# Altium PCB Wristband-v3.PcbDoc (part 3 of 3)
Units mil, origin at the board's own origin, x right, y up, seen from the top; angles counter-clockwise.
Board outline 1990 x 930 mil, 2 copper layers (Top Layer, Bottom Layer); 20 components, 39 nets, 136 pads, 57 vias.
Unrouted connection lines stored in the file: 2.
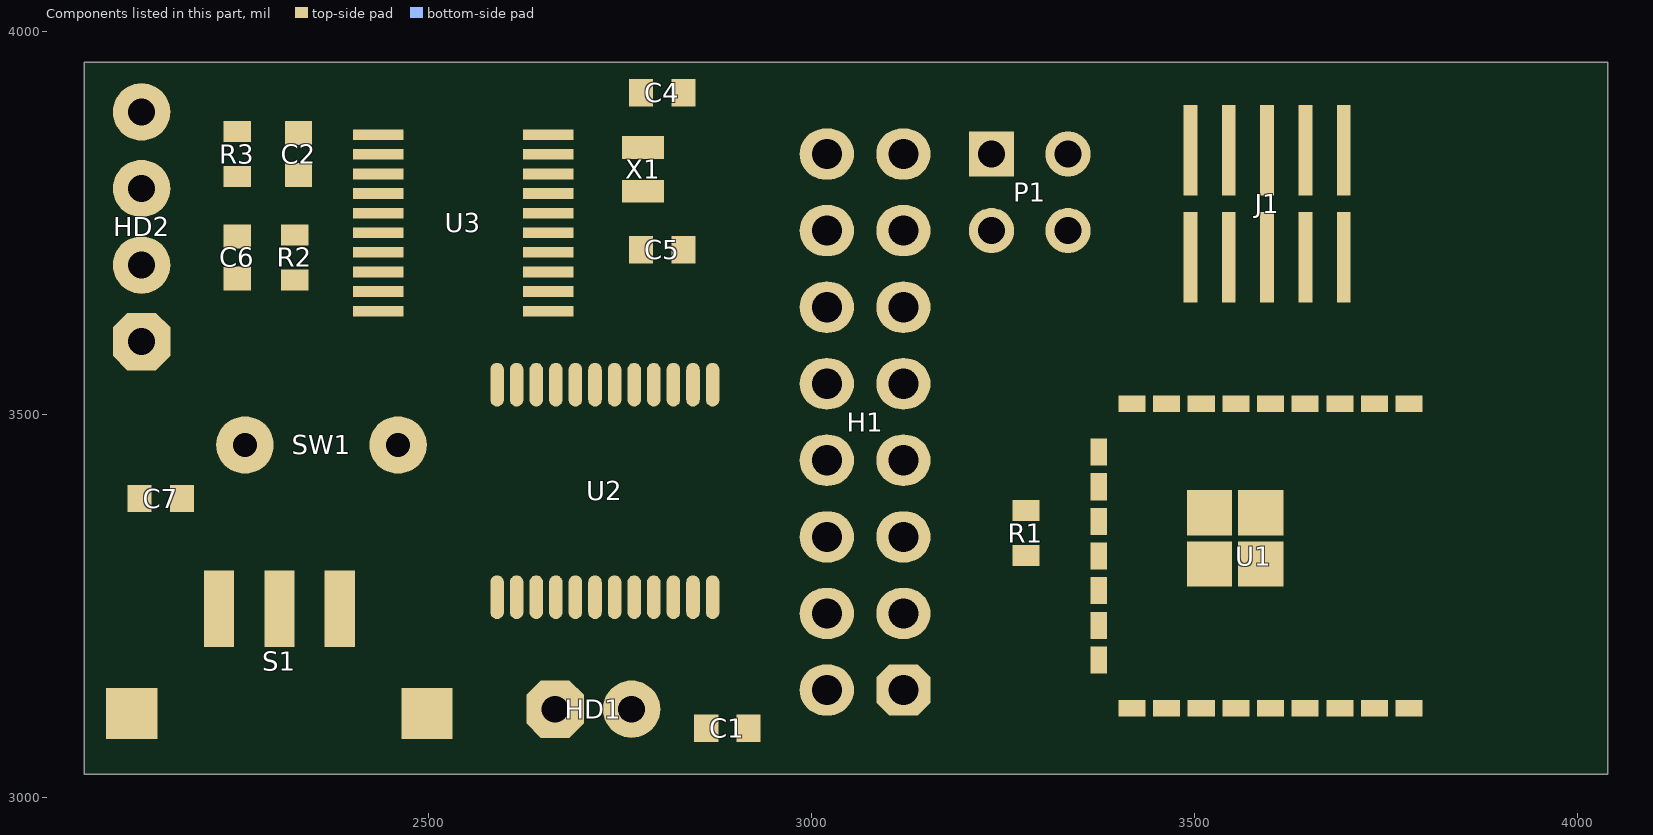
[diagram p3: the components of this part, seen from the top]

## Via types
v1: diameter 10, hole 8, Top Layer to Bottom Layer, 35 vias
v2: diameter 40, hole 25, Top Layer to Bottom Layer, 22 vias

## Nets (pads, with @x,y where several pads share a name; then routed paths per layer and width w, separated by ;. In a path a pad name is that pad's centre, name@x,y a point inside that pad or via, vN(x,y) a via of type N, cw(c..) or ccw(c..) an arc to the next point about the centre after c; other vN are vias at no path point) (continued)
copper on no net: (continued)
  Top Layer w0.5: 3899.25,3804.5 3903.75,3804.5 ; 3899.25,3805 3903.75,3805 ; 3899.25,3805.5 3903.75,3805.5 ; 3899.25,3806 3903.75,3806 ; 3899.25,3806.5 3903.75,3806.5 ; 3899.25,3807 3903.75,3807 ; 3899.25,3807.5 3903.75,3807.5 ; 3899.25,3808 3903.75,3808 ; 3899.25,3808.5 3903.75,3808.5 ; 3899.25,3809 3903.75,3809 ; 3899.25,3809.5 3903.75,3809.5 ; 3899.25,3810 3903.75,3810 ; 3899.25,3810.5 3903.75,3810.5 ; 3899.25,3811 3903.75,3811 ; 3899.25,3839 3969.75,3839 ; 3899.25,3879.5 3924.75,3879.5 ; 3899.75,3704.5 3905.25,3704.5 ; 3899.75,3752 3966.25,3752 ; 3899.75,3839.5 3969.25,3839.5 ; 3900.25,3713.5 3923.25,3713.5 ; 3900.25,3752.5 3966.75,3752.5 ; 3900.25,3840 3968.75,3840 ; 3900.25,3869 3921.25,3869 ; 3900.25,3889 3905.75,3889 ; 3900.75,3705 3904.75,3705 ; 3900.75,3726.5 3920.25,3726.5 ; 3900.75,3753 3966.75,3753 ; 3900.75,3840.5 3968.25,3840.5 ; 3900.75,3880 3921.25,3880 ; 3901.25,3705.5 3904.25,3705.5 ; 3901.25,3706 3904.25,3706 ; 3901.25,3706.5 3903.75,3706.5 ; 3901.25,3712.5 3905.75,3712.5 ; 3901.25,3713 3906.75,3713 ; 3901.25,3753.5 3967.25,3753.5 ; 3901.25,3841 3968.25,3841 ; 3901.25,3888.5 3905.75,3888.5 ; 3901.75,3712 3905.25,3712 ; 3901.75,3880.5 3905.75,3880.5 ; 3901.75,3888 3905.75,3888 ; 3902.25,3711 3904.75,3711 ; 3902.25,3711.5 3904.75,3711.5 ; 3902.25,3754 3967.75,3754 ; 3902.25,3841.5 3967.75,3841.5 ; 3902.25,3842 3967.25,3842 ; 3902.25,3881 3905.75,3881 ; 3902.25,3887 3905.75,3887 ; 3902.25,3887.5 3905.75,3887.5 ; 3902.75,3754.5 3968.25,3754.5 ; 3902.75,3881.5 3905.75,3881.5 ; 3902.75,3882 3905.75,3882 ; 3902.75,3886 3905.75,3886 ; 3902.75,3886.5 3905.75,3886.5 ; 3903.25,3842.5 3966.75,3842.5 ; 3903.25,3882.5 3905.75,3882.5 ; 3903.25,3883 3905.75,3883 ; 3903.25,3883.5 3905.75,3883.5 ; 3903.25,3884 3905.75,3884 ; 3903.25,3884.5 3905.75,3884.5 ; 3903.25,3885 3905.75,3885 ; 3903.25,3885.5 3905.75,3885.5 ; 3903.75,3755 3968.25,3755 ; 3903.75,3843 3966.75,3843 ; 3904.25,3755.5 3968.75,3755.5 ; 3904.25,3843.5 3966.25,3843.5 ; 3904.75,3696 3916.25,3696 ; 3904.75,3756 3969.25,3756 ; 3904.75,3844 3965.75,3844 ; 3904.75,3899.5 3916.75,3899.5 ; 3905.25,3756.5 3969.75,3756.5 ; 3905.75,3706.5 3910.25,3706.5 ; 3905.75,3707 3910.25,3707 ; 3905.75,3707.5 3910.25,3707.5 ; 3905.75,3708 3910.25,3708 ; 3905.75,3708.5 3910.25,3708.5 ; 3905.75,3709 3910.25,3709 ; 3905.75,3709.5 3910.25,3709.5 ; 3905.75,3844.5 3965.25,3844.5 ; 3906.25,3705.5 3909.75,3705.5 ; 3906.25,3706 3909.75,3706 ; 3906.25,3710 3910.25,3710 ; 3906.25,3710.5 3909.75,3710.5 ; 3906.25,3757 3969.75,3757 ; 3906.25,3784 3907.75,3784 ; 3906.25,3784.5 3907.75,3784.5 ; 3906.25,3785 3907.75,3785 ; 3906.25,3845 3964.75,3845 ; 3906.25,3869.5 3914.75,3869.5 ; 3906.75,3711 3909.75,3711 ; 3906.75,3726 3914.25,3726 ; 3906.75,3757.5 3970.25,3757.5 ; 3906.75,3785.5 3907.75,3785.5 ; 3906.75,3786 3907.75,3786 ; 3906.75,3786.5 3907.75,3786.5 ; 3906.75,3787 3907.75,3787 ; 3906.75,3787.5 3908.25,3787.5 ; 3906.75,3788 3908.25,3788 ; 3906.75,3845.5 3964.25,3845.5 ; 3907.25,3705 3908.75,3705 ; 3907.25,3711.5 3908.75,3711.5 ; 3907.25,3758 3970.25,3758 ; 3907.25,3788.5 3908.25,3788.5 ; 3907.25,3789 3908.25,3789 ; 3907.25,3789.5 3908.75,3789.5 ; 3907.25,3790 3908.75,3790 ; 3907.25,3790.5 3908.75,3790.5 ; 3907.25,3846 3964.25,3846 ; 3907.25,3880.5 3915.25,3880.5 ; 3907.25,3882 3910.75,3882 ; 3907.25,3882.5 3910.25,3882.5 ; 3907.25,3883 3910.25,3883 ; 3907.25,3883.5 3909.75,3883.5 ; 3907.25,3884 3909.75,3884 ; 3907.25,3886 3910.25,3886 ; 3907.25,3886.5 3910.75,3886.5 ; 3907.25,3887 3910.75,3887 ; 3907.25,3887.5 3910.75,3887.5 ; 3907.25,3888 3910.75,3888 ; 3907.75,3758.5 3970.75,3758.5 ; 3907.75,3791 3908.75,3791 ; 3907.75,3791.5 3909.25,3791.5 ; 3907.75,3792 3909.25,3792 ; 3907.75,3881 3911.25,3881 ; 3907.75,3881.5 3910.75,3881.5 ; 3908.25,3792.5 3909.75,3792.5 ; 3908.25,3793 3909.75,3793 ; 3908.25,3793.5 3910.25,3793.5 ; 3908.25,3846.5 3963.25,3846.5 ; 3908.75,3713 3922.75,3713 ; 3908.75,3759 3971.25,3759 ; 3908.75,3794 3910.25,3794 ; 3908.75,3847 3963.25,3847 ; 3908.75,3888.5 3909.25,3888.5 ; 3909.25,3703.5 3914.75,3703.5 ; 3909.25,3759.5 3971.25,3759.5 ; 3909.25,3794.5 3910.75,3794.5 ; 3909.25,3795 3910.75,3795 ; 3909.25,3795.5 3911.25,3795.5 ; 3909.25,3847.5 3962.75,3847.5 ; 3909.75,3712.5 3914.25,3712.5 ; 3909.75,3760 3971.75,3760 ; 3909.75,3796 3911.25,3796 ; 3909.75,3890 3954.25,3890 ; 3910.25,3704 3914.75,3704 ; 3910.25,3760.5 3972.25,3760.5 ; 3910.25,3796.5 3911.75,3796.5 ; 3910.25,3797 3911.75,3797 ; 3910.25,3848 3962.25,3848 ; 3910.75,3704.5 3914.75,3704.5 ; 3910.75,3712 3914.25,3712 ; 3910.75,3797.5 3912.25,3797.5 ; 3910.75,3848.5 3961.75,3848.5 ; 3911.25,3705 3914.75,3705 ; 3911.25,3705.5 3914.75,3705.5 ; 3911.25,3711 3914.25,3711 ; 3911.25,3711.5 3914.25,3711.5 ; 3911.25,3761 3972.25,3761 ; 3911.25,3761.5 3972.75,3761.5 ; 3911.25,3798 3912.75,3798 ; 3911.25,3798.5 3913.25,3798.5 ; 3911.25,3849 3961.25,3849 ; 3911.25,3884 3915.25,3884 ; 3911.25,3884.5 3915.25,3884.5 ; 3911.25,3885 3915.75,3885 ; 3911.75,3706 3914.75,3706 ; 3911.75,3706.5 3914.75,3706.5 ; 3911.75,3710 3914.25,3710 ; 3911.75,3710.5 3914.25,3710.5 ; 3911.75,3799 3913.75,3799 ; 3911.75,3883 3915.25,3883 ; 3911.75,3883.5 3915.25,3883.5 ; 3911.75,3889.5 3916.25,3889.5 ; 3912.25,3707 3914.75,3707 ; 3912.25,3707.5 3914.25,3707.5 ; 3912.25,3708 3914.25,3708 ; 3912.25,3708.5 3914.25,3708.5 ; 3912.25,3709 3914.25,3709 ; 3912.25,3709.5 3914.25,3709.5 ; 3912.25,3762 3973.25,3762 ; 3912.25,3799.5 3914.25,3799.5 ; 3912.25,3849.5 3960.75,3849.5 ; 3912.25,3882 3915.25,3882 ; 3912.25,3882.5 3915.25,3882.5 ; 3912.25,3885.5 3915.75,3885.5 ; 3912.25,3889 3915.75,3889 ; 3912.75,3762.5 3973.25,3762.5 ; 3912.75,3784.5 3920.75,3784.5 ; 3912.75,3785 3920.75,3785 ; 3912.75,3785.5 3920.75,3785.5 ; 3912.75,3786 3919.25,3786 ; 3912.75,3786.5 3919.25,3786.5 ; 3912.75,3787 3918.75,3787 ; 3912.75,3787.5 3918.25,3787.5 ; 3912.75,3788 3918.25,3788 ; 3912.75,3788.5 3917.75,3788.5 ; 3912.75,3789 3917.75,3789 ; 3912.75,3789.5 3917.25,3789.5 ; 3912.75,3790 3917.25,3790 ; 3912.75,3790.5 3916.75,3790.5 ; 3912.75,3791 3916.25,3791 ; 3912.75,3791.5 3916.25,3791.5 ; 3912.75,3792 3916.75,3792 ; 3912.75,3792.5 3916.75,3792.5 ; 3912.75,3793 3915.25,3793 ; 3912.75,3793.5 3915.25,3793.5 ; 3912.75,3794 3914.75,3794 ; 3912.75,3794.5 3914.25,3794.5 ; 3912.75,3795 3914.25,3795 ; 3912.75,3795.5 3913.75,3795.5 ; 3912.75,3796 3913.25,3796 ; 3912.75,3796.5 3913.25,3796.5 ; 3912.75,3800 3914.75,3800 ; 3912.75,3850 3960.25,3850 ; 3912.75,3881 3915.25,3881 ; 3912.75,3881.5 3915.25,3881.5 ; 3912.75,3886 3915.75,3886 ; 3912.75,3886.5 3915.75,3886.5 ; 3912.75,3887 3915.75,3887 ; 3912.75,3887.5 3915.75,3887.5 ; 3912.75,3888 3915.75,3888 ; 3912.75,3888.5 3915.75,3888.5 ; 3913.25,3763 3973.25,3763 ; 3913.25,3784 3920.75,3784 ; 3913.25,3800.5 3915.25,3800.5 ; 3913.75,3763.5 3973.75,3763.5 ; 3913.75,3801 3915.75,3801 ; 3913.75,3811 3921.25,3811 ; 3913.75,3811.5 3921.25,3811.5 ; 3913.75,3850.5 3959.25,3850.5 ; 3914.25,3764 3974.25,3764 ; 3914.25,3801.5 3916.25,3801.5 ; 3914.25,3810.5 3921.25,3810.5 ; 3914.25,3851 3959.25,3851 ; 3914.75,3764.5 3974.25,3764.5 ; 3914.75,3802 3916.75,3802 ; 3914.75,3809.5 3921.25,3809.5 ; 3914.75,3810 3921.25,3810 ; 3915.25,3802.5 3917.25,3802.5 ; 3915.25,3809 3921.25,3809 ; 3915.25,3851.5 3958.25,3851.5 ; 3915.25,3869.5 3915.75,3869.5 ; 3915.75,3703.5 3949.75,3703.5 ; 3915.75,3711.5 3921.75,3711.5 ; 3915.75,3712 3921.75,3712 ; 3915.75,3712.5 3922.25,3712.5 ; 3915.75,3765 3974.25,3765 ; 3915.75,3793 3917.25,3793 ; 3915.75,3793.5 3917.25,3793.5 ; 3915.75,3803 3918.25,3803 ; 3915.75,3807.5 3921.25,3807.5 ; 3915.75,3808 3921.25,3808 ; 3915.75,3808.5 3921.25,3808.5 ; 3915.75,3852 3957.75,3852 ; 3916.25,3705.5 3922.75,3705.5 ; 3916.25,3706 3922.25,3706 ; 3916.25,3706.5 3922.25,3706.5 ; 3916.25,3707 3921.75,3707 ; 3916.25,3707.5 3921.75,3707.5 ; 3916.25,3708 3921.25,3708 ; 3916.25,3708.5 3921.25,3708.5 ; 3916.25,3709 3921.25,3709 ; 3916.25,3709.5 3921.25,3709.5 ; 3916.25,3710 3921.25,3710 ; 3916.25,3710.5 3921.25,3710.5 ; 3916.25,3711 3921.25,3711 ; 3916.25,3765.5 3975.25,3765.5 ; 3916.25,3794 3917.75,3794 ; 3916.25,3807 3921.25,3807 ; 3916.75,3766 3975.25,3766 ; 3916.75,3766.5 3975.25,3766.5 ; 3916.75,3794.5 3918.25,3794.5 ; 3916.75,3795 3918.75,3795 ; 3916.75,3803.5 3921.75,3803.5 ; 3916.75,3806 3924.25,3806 ; 3916.75,3806.5 3921.25,3806.5 ; 3916.75,3852.5 3957.25,3852.5 ; 3916.75,3880.5 3921.25,3880.5 ; 3917.25,3795.5 3919.25,3795.5 ; 3917.25,3804 3921.75,3804 ; 3917.25,3805 3921.75,3805 ; 3917.25,3805.5 3922.75,3805.5 ; 3917.25,3853 3956.75,3853 ; 3917.25,3881 3920.75,3881 ; 3917.25,3881.5 3920.25,3881.5 ; 3917.25,3882 3920.25,3882 ; 3917.25,3882.5 3920.25,3882.5 ; 3917.25,3883 3919.75,3883 ; 3917.75,3767 3975.75,3767 ; 3917.75,3767.5 3975.75,3767.5 ; 3917.75,3796 3919.75,3796 ; 3917.75,3804.5 3921.75,3804.5 ; 3917.75,3853.5 3956.25,3853.5 ; 3917.75,3883.5 3919.75,3883.5 ; 3917.75,3886 3918.25,3886 ; 3917.75,3886.5 3918.25,3886.5 ; 3917.75,3887 3919.25,3887 ; 3917.75,3887.5 3919.25,3887.5 ; 3917.75,3888 3920.25,3888 ; 3917.75,3888.5 3920.75,3888.5 ; 3917.75,3889 3921.25,3889 ; 3917.75,3889.5 3955.25,3889.5 ; 3918.25,3796.5 3920.25,3796.5 ; 3918.25,3884 3919.25,3884 ; 3918.75,3724 3957.25,3724 ; 3918.75,3768 3976.25,3768 ; 3918.75,3797 3920.75,3797 ; 3918.75,3802.5 3921.75,3802.5 ; 3918.75,3803 3921.75,3803 ; 3918.75,3854 3955.75,3854 ; 3919.25,3768.5 3976.25,3768.5 ; 3919.25,3797.5 3921.25,3797.5 ; 3919.25,3801.5 3921.75,3801.5 ; 3919.25,3802 3921.75,3802 ; 3919.75,3769 3976.25,3769 ; 3919.75,3786 3921.25,3786 ; 3919.75,3786.5 3921.25,3786.5 ; 3919.75,3798 3922.25,3798 ; 3919.75,3800.5 3921.75,3800.5 ; 3919.75,3801 3921.75,3801 ; 3919.75,3854.5 3954.75,3854.5 ; 3919.75,3871.5 3957.75,3871.5 ; 3920.25,3704 3950.75,3704 ; 3920.25,3704.5 3924.25,3704.5 ; 3920.25,3705 3923.25,3705 ; 3920.25,3769.5 3976.75,3769.5 ; 3920.25,3787 3921.25,3787 ; 3920.25,3787.5 3921.75,3787.5 ; 3920.25,3788 3921.75,3788 ; 3920.25,3800 3921.75,3800 ; 3920.25,3855 3954.25,3855 ; 3920.25,3885.5 3925.75,3885.5 ; 3920.25,3886 3925.75,3886 ; 3920.75,3770 3977.25,3770 ; 3920.75,3788.5 3922.25,3788.5 ; 3920.75,3789 3922.25,3789 ; 3920.75,3798.5 3923.25,3798.5 ; 3920.75,3799 3924.25,3799 ; 3920.75,3799.5 3921.75,3799.5 ; 3920.75,3884 3925.25,3884 ; 3920.75,3884.5 3925.25,3884.5 ; 3920.75,3885 3925.75,3885 ; 3920.75,3886.5 3925.75,3886.5 ; 3921.25,3770.5 3977.25,3770.5 ; 3921.25,3789.5 3922.75,3789.5 ; 3921.25,3790 3923.25,3790 ; 3921.25,3855.5 3953.25,3855.5 ; 3921.25,3883.5 3925.25,3883.5 ; 3921.25,3887 3926.25,3887 ; 3921.75,3724.5 3957.25,3724.5 ; 3921.75,3771 3977.25,3771 ; 3921.75,3790.5 3923.25,3790.5 ; 3921.75,3806.5 3925.75,3806.5 ; 3921.75,3856 3952.75,3856 ; 3921.75,3882 3925.25,3882 ; 3921.75,3882.5 3925.25,3882.5 ; 3921.75,3883 3925.25,3883 ; 3921.75,3887.5 3926.25,3887.5 ; 3922.25,3771.5 3977.75,3771.5 ; 3922.25,3791 3923.75,3791 ; 3922.25,3799.5 3925.25,3799.5 ; 3922.25,3881 3924.75,3881 ; 3922.25,3881.5 3925.25,3881.5 ; 3922.25,3888 3926.25,3888 ; 3922.75,3772 3977.75,3772 ; 3922.75,3791.5 3924.25,3791.5 ; 3922.75,3792 3925.25,3792 ; 3922.75,3800 3926.75,3800 ; 3922.75,3807 3929.75,3807 ; 3922.75,3856.5 3952.25,3856.5 ; 3922.75,3871 3957.75,3871 ; 3922.75,3880 3924.75,3880 ; 3922.75,3880.5 3924.75,3880.5 ; 3922.75,3888.5 3926.25,3888.5 ; 3923.25,3707.5 3927.75,3707.5 ; 3923.25,3708 3927.75,3708 ; 3923.25,3708.5 3927.75,3708.5 ; 3923.25,3709 3927.75,3709 ; 3923.25,3709.5 3927.75,3709.5 ; 3923.25,3710 3927.75,3710 ; 3923.25,3710.5 3927.75,3710.5 ; 3923.25,3711 3927.25,3711 ; 3923.25,3711.5 3927.25,3711.5 ; 3923.25,3772.5 3978.25,3772.5 ; 3923.25,3792.5 3926.25,3792.5 ; 3923.25,3889 3956.25,3889 ; 3923.75,3706.5 3927.25,3706.5 ; 3923.75,3707 3927.75,3707 ; 3923.75,3712 3926.75,3712 ; 3923.75,3773 3978.25,3773 ; 3923.75,3857 3951.25,3857 ; 3924.25,3773.5 3978.25,3773.5 ; 3924.25,3793 3926.75,3793 ; 3924.25,3800.5 3928.25,3800.5 ; 3924.75,3706 3926.75,3706 ; 3924.75,3712.5 3925.75,3712.5 ; 3924.75,3774 3978.25,3774 ; 3924.75,3793.5 3928.25,3793.5 ; 3924.75,3807.5 3935.75,3807.5 ; 3924.75,3857.5 3950.75,3857.5 ; 3925.25,3725 3957.75,3725 ; 3925.25,3774.5 3978.75,3774.5 ; 3925.25,3801 3935.25,3801 ; 3925.25,3858 3950.25,3858 ; 3925.75,3714 3931.25,3714 ; 3925.75,3775 3978.75,3775 ; 3925.75,3794 3929.25,3794 ; 3925.75,3870.5 3957.25,3870.5 ; 3926.25,3775.5 3979.25,3775.5 ; 3926.75,3704.5 3951.75,3704.5 ; 3926.75,3776 3979.25,3776 ; 3926.75,3794.5 3942.75,3794.5 ; 3926.75,3808 3936.25,3808 ; 3926.75,3858.5 3949.25,3858.5 ; 3926.75,3881 3933.75,3881 ; 3926.75,3881.5 3934.25,3881.5 ; 3926.75,3882 3934.25,3882 ; 3926.75,3882.5 3934.25,3882.5 ; 3927.25,3713.5 3931.25,3713.5 ; 3927.25,3725.5 3957.75,3725.5 ; 3927.25,3776.5 3979.25,3776.5 ; 3927.25,3859 3948.25,3859 ; 3927.25,3883 3934.25,3883 ; 3927.75,3713 3931.25,3713 ; 3927.75,3777 3979.25,3777 ; 3927.75,3777.5 3979.75,3777.5 ; 3927.75,3782.5 3934.75,3782.5 ; 3927.75,3783 3934.75,3783 ; 3927.75,3783.5 3934.75,3783.5 ; 3927.75,3784 3934.75,3784 ; 3927.75,3784.5 3934.75,3784.5 ; 3927.75,3785 3934.25,3785 ; 3927.75,3801.5 3934.75,3801.5 ; 3927.75,3870 3957.25,3870 ; 3927.75,3885 3935.25,3885 ; 3927.75,3885.5 3935.25,3885.5 ; 3927.75,3886 3935.25,3886 ; 3927.75,3886.5 3930.75,3886.5 ; 3927.75,3887 3928.25,3887 ; 3928.25,3705 3953.25,3705 ; 3928.25,3712.5 3931.25,3712.5 ; 3928.25,3781.5 3934.25,3781.5 ; 3928.25,3782 3934.25,3782 ; 3928.25,3785.5 3934.25,3785.5 ; 3928.25,3880.5 3933.75,3880.5 ; 3928.75,3705.5 3954.25,3705.5 ; 3928.75,3706 3933.25,3706 ; 3928.75,3711.5 3931.75,3711.5 ; 3928.75,3712 3931.75,3712 ; 3928.75,3778 3929.25,3778 ; 3928.75,3781 3933.75,3781 ; 3928.75,3786 3933.75,3786 ; 3928.75,3795 3941.25,3795 ; 3928.75,3859.5 3947.25,3859.5 ; 3928.75,3888.5 3957.25,3888.5 ; 3929.25,3706.5 3932.75,3706.5 ; 3929.25,3707 3932.75,3707 ; 3929.25,3710.5 3931.75,3710.5 ; 3929.25,3711 3931.75,3711 ; 3929.25,3780.5 3933.25,3780.5 ; 3929.25,3786.5 3933.25,3786.5 ; 3929.25,3860 3946.75,3860 ; 3929.75,3707.5 3932.75,3707.5 ; 3929.75,3708 3932.25,3708 ; 3929.75,3708.5 3932.25,3708.5 ; 3929.75,3709 3932.25,3709 ; 3929.75,3709.5 3932.25,3709.5 ; 3929.75,3710 3932.25,3710 ; 3929.75,3726 3958.25,3726 ; 3929.75,3869.5 3956.75,3869.5 ; 3929.75,3884.5 3934.75,3884.5 ; 3930.25,3789.5 3935.25,3789.5 ; 3930.25,3790 3935.75,3790 ; 3930.25,3790.5 3936.25,3790.5 ; 3930.25,3791 3936.75,3791 ; 3930.25,3791.5 3937.25,3791.5 ; 3930.25,3792 3937.75,3792 ; 3930.25,3792.5 3938.25,3792.5 ; 3930.25,3793 3938.25,3793 ; 3930.25,3793.5 3945.25,3793.5 ; 3930.25,3794 3943.75,3794 ; 3930.25,3795.5 3940.25,3795.5 ; 3930.25,3796 3939.25,3796 ; 3930.25,3796.5 3938.25,3796.5 ; 3930.25,3797 3937.25,3797 ; 3930.25,3797.5 3936.75,3797.5 ; 3930.25,3798 3936.75,3798 ; 3930.25,3798.5 3936.25,3798.5 ; 3930.25,3799 3935.75,3799 ; 3930.25,3799.5 3935.25,3799.5 ; 3930.25,3800 3935.25,3800 ; 3930.25,3800.5 3935.25,3800.5 ; 3930.25,3802 3934.75,3802 ; 3930.25,3802.5 3934.75,3802.5 ; 3930.25,3803 3934.75,3803 ; 3930.25,3803.5 3934.75,3803.5 ; 3930.25,3804 3934.75,3804 ; 3930.25,3804.5 3934.75,3804.5 ; 3930.25,3805 3935.25,3805 ; 3930.25,3805.5 3935.25,3805.5 ; 3930.25,3806 3935.25,3806 ; 3930.25,3806.5 3935.25,3806.5 ; 3930.25,3807 3935.75,3807 ; 3930.25,3808.5 3936.25,3808.5 ; 3930.25,3809 3936.75,3809 ; 3930.25,3809.5 3937.25,3809.5 ; 3930.25,3810 3937.25,3810 ; 3930.25,3810.5 3936.75,3810.5 ; 3930.25,3811 3936.75,3811 ; 3930.25,3811.5 3936.75,3811.5 ; 3930.25,3880 3933.75,3880 ; 3930.25,3883.5 3934.25,3883.5 ; 3930.25,3884 3934.75,3884 ; 3930.75,3726.5 3959.25,3726.5 ; 3930.75,3780 3931.75,3780 ; 3930.75,3787 3932.25,3787 ; 3930.75,3860.5 3945.75,3860.5 ; 3930.75,3888 3958.25,3888 ; 3931.25,3869 3956.25,3869 ; 3931.25,3878.5 3933.25,3878.5 ; 3931.25,3879 3933.25,3879 ; 3931.25,3879.5 3933.25,3879.5 ; 3931.75,3861 3945.25,3861 ; 3932.75,3713.5 3936.25,3713.5 ; 3932.75,3861.5 3943.75,3861.5 ; 3932.75,3886.5 3935.25,3886.5 ; 3932.75,3887 3935.25,3887 ; 3932.75,3887.5 3959.25,3887.5 ; 3933.25,3711.5 3935.25,3711.5 ; 3933.25,3712 3936.25,3712 ; 3933.25,3712.5 3936.25,3712.5 ; 3933.25,3713 3936.75,3713 ; 3933.25,3727 3959.75,3727 ; 3933.25,3778 3979.75,3778 ; 3933.25,3868.5 3956.75,3868.5 ; 3933.75,3709.5 3936.25,3709.5 ; 3933.75,3714 3936.25,3714 ; 3933.75,3789 3934.75,3789 ; 3933.75,3862 3943.25,3862 ; 3934.25,3706 3955.25,3706 ; 3934.25,3707.5 3937.75,3707.5 ; 3934.25,3708 3937.25,3708 ; 3934.25,3708.5 3937.25,3708.5 ; 3934.25,3709 3936.75,3709 ; 3934.25,3727.5 3984.75,3727.5 ; 3934.25,3778.5 3979.75,3778.5 ; 3934.75,3706.5 3956.25,3706.5 ; 3934.75,3707 3956.75,3707 ; 3934.75,3710 3935.75,3710 ; 3934.75,3779 3980.25,3779 ; 3934.75,3868 3965.75,3868 ; 3935.25,3862.5 3942.25,3862.5 ; 3935.25,3879 3938.75,3879 ; 3935.25,3879.5 3939.25,3879.5 ; 3935.75,3779.5 3980.25,3779.5 ; 3935.75,3780 3980.25,3780 ; 3935.75,3880 3939.75,3880 ; 3935.75,3880.5 3939.75,3880.5 ; 3935.75,3881 3940.25,3881 ; 3935.75,3881.5 3940.25,3881.5 ; 3935.75,3882 3940.25,3882 ; 3935.75,3887 3960.25,3887 ; 3936.25,3728 3970.75,3728 ; 3936.25,3780.5 3980.25,3780.5 ; 3936.25,3867.5 3966.25,3867.5 ; 3936.25,3882.5 3940.25,3882.5 ; 3936.25,3883 3940.25,3883 ; 3936.75,3715.5 3941.25,3715.5 ; 3936.75,3728.5 3970.75,3728.5 ; 3936.75,3781 3980.25,3781 ; 3936.75,3781.5 3980.75,3781.5 ; 3936.75,3782 3980.75,3782 ; 3936.75,3782.5 3980.75,3782.5 ; 3936.75,3863 3941.25,3863 ; 3936.75,3883.5 3939.75,3883.5 ; 3936.75,3884 3939.75,3884 ; 3936.75,3884.5 3938.75,3884.5 ; 3936.75,3885 3938.25,3885 ; 3937.25,3710.5 3941.25,3710.5 ; 3937.25,3711 3941.25,3711 ; 3937.25,3783 3942.25,3783 ; 3937.25,3783.5 3940.25,3783.5 ; 3937.25,3784 3938.25,3784 ; 3937.25,3867 3943.25,3867 ; 3937.75,3710 3941.25,3710 ; 3937.75,3711.5 3941.25,3711.5 ; 3937.75,3712 3941.25,3712 ; 3937.75,3714.5 3941.25,3714.5 ; 3937.75,3715 3941.25,3715 ; 3937.75,3886.5 3960.75,3886.5 ; 3938.25,3709.5 3941.25,3709.5 ; 3938.25,3712.5 3941.25,3712.5 ; 3938.25,3713 3941.25,3713 ; 3938.25,3713.5 3941.25,3713.5 ; 3938.25,3714 3941.25,3714 ; 3938.25,3811 3945.75,3811 ; 3938.25,3811.5 3945.75,3811.5 ; 3938.25,3812 3946.25,3812 ; 3938.25,3812.5 3946.25,3812.5 ; 3938.25,3813 3945.75,3813 ; 3938.25,3813.5 3945.75,3813.5 ; 3938.25,3814 3945.75,3814 ; 3938.25,3877 3950.25,3877 ; 3938.75,3708.5 3941.25,3708.5 ; 3938.75,3709 3941.25,3709 ; 3938.75,3729 3971.25,3729 ; 3938.75,3810 3945.25,3810 ; 3938.75,3810.5 3945.25,3810.5 ; 3938.75,3814.5 3945.25,3814.5 ; 3938.75,3863.5 3939.75,3863.5 ; 3938.75,3866.5 3940.25,3866.5 ; 3939.25,3708 3941.25,3708 ; 3939.25,3793 3946.25,3793 ; 3939.25,3809.5 3944.75,3809.5 ; 3939.25,3815 3945.25,3815 ; 3939.25,3886 3962.25,3886 ; 3939.75,3707.5 3958.25,3707.5 ; 3939.75,3729.5 3971.75,3729.5 ; 3939.75,3792.5 3946.75,3792.5 ; 3939.75,3809 3944.25,3809 ; 3939.75,3815.5 3944.25,3815.5 ; 3939.75,3877.5 3949.75,3877.5 ; 3940.25,3816 3943.75,3816 ; 3940.25,3878 3949.25,3878 ; 3940.75,3730 3972.25,3730 ; 3940.75,3792 3947.25,3792 ; 3940.75,3878.5 3949.25,3878.5 ; 3940.75,3885 3963.75,3885 ; 3940.75,3885.5 3962.75,3885.5 ; 3941.25,3791.5 3947.25,3791.5 ; 3941.25,3879 3949.25,3879 ; 3941.25,3884.5 3964.25,3884.5 ; 3941.75,3708 3959.25,3708 ; 3941.75,3730.5 3987.25,3730.5 ; 3941.75,3879.5 3949.25,3879.5 ; 3941.75,3880 3949.25,3880 ; 3941.75,3880.5 3949.25,3880.5 ; 3941.75,3881 3950.25,3881 ; 3941.75,3883.5 3965.75,3883.5 ; 3941.75,3884 3965.25,3884 ; 3942.25,3881.5 3950.75,3881.5 ; 3942.25,3882 3968.25,3882 ; 3942.25,3882.5 3967.25,3882.5 ; 3942.25,3883 3966.75,3883 ; 3942.75,3708.5 3960.25,3708.5 ; 3942.75,3712.5 3944.25,3712.5 ; 3942.75,3713 3945.25,3713 ; 3942.75,3713.5 3945.25,3713.5 ; 3942.75,3714 3944.25,3714 ; 3942.75,3714.5 3944.25,3714.5 ; 3942.75,3715 3943.75,3715 ; 3942.75,3715.5 3943.25,3715.5 ; 3942.75,3791 3946.25,3791 ; 3943.25,3709 3960.75,3709 ; 3943.25,3709.5 3961.75,3709.5 ; 3943.25,3710 3962.25,3710 ; 3943.25,3710.5 3947.25,3710.5 ; 3943.25,3731 3987.75,3731 ; 3943.75,3711 3946.75,3711 ; 3943.75,3717.5 3948.75,3717.5 ; 3943.75,3718 3948.75,3718 ; 3943.75,3731.5 3988.25,3731.5 ; 3943.75,3864 3952.25,3864 ; 3943.75,3864.5 3950.25,3864.5 ; 3944.25,3717 3949.25,3717 ; 3944.25,3803.5 3950.25,3803.5 ; 3944.25,3804 3950.25,3804 ; 3944.25,3817.5 3979.75,3817.5 ; 3944.75,3711.5 3946.25,3711.5 ; 3944.75,3716 3949.75,3716 ; 3944.75,3716.5 3949.25,3716.5 ; 3944.75,3732 3988.75,3732 ; 3944.75,3803 3951.25,3803 ; 3944.75,3804.5 3948.75,3804.5 ; 3944.75,3817 3979.75,3817 ; 3945.25,3715.5 3949.75,3715.5 ; 3945.25,3863.5 3953.25,3863.5 ; 3945.75,3714.5 3950.25,3714.5 ; 3945.75,3715 3950.25,3715 ; 3945.75,3732.5 3989.25,3732.5 ; 3945.75,3802.5 3951.25,3802.5 ; 3945.75,3805 3946.25,3805 ; 3945.75,3816 3980.25,3816 ; 3945.75,3816.5 3980.25,3816.5 ; 3945.75,3863 3954.25,3863 ; 3946.75,3713.5 3950.75,3713.5 ; 3946.75,3714 3950.75,3714 ; 3946.75,3733 3989.75,3733 ; 3946.75,3802 3982.25,3802 ; 3946.75,3805 3947.75,3805 ; 3946.75,3815 3980.25,3815 ; 3946.75,3815.5 3980.25,3815.5 ; 3946.75,3862.5 3954.75,3862.5 ; 3947.25,3713 3951.25,3713 ; 3947.25,3813 3980.75,3813 ; 3947.25,3813.5 3980.75,3813.5 ; 3947.25,3814 3980.75,3814 ; 3947.25,3814.5 3980.25,3814.5 ; 3947.75,3712 3951.25,3712 ; 3947.75,3712.5 3951.25,3712.5 ; 3947.75,3733.5 3989.75,3733.5 ; 3947.75,3783 3981.25,3783 ; 3947.75,3862 3955.25,3862 ; 3948.25,3711.5 3964.75,3711.5 ; 3948.75,3710.5 3963.75,3710.5 ; 3948.75,3711 3964.25,3711 ; 3948.75,3734 3979.25,3734 ; 3948.75,3801.5 3982.25,3801.5 ; 3948.75,3861.5 3955.75,3861.5 ; 3948.75,3874.5 3952.25,3874.5 ; 3948.75,3875 3952.25,3875 ; 3948.75,3875.5 3951.75,3875.5 ; 3949.25,3734.5 3978.75,3734.5 ; 3949.25,3783.5 3981.25,3783.5 ; 3949.25,3861 3956.25,3861 ; 3949.25,3874 3952.25,3874 ; 3949.75,3719.5 3954.25,3719.5 ; 3949.75,3801 3982.25,3801 ; 3949.75,3812.5 3981.25,3812.5 ; 3949.75,3867 3962.25,3867 ; 3949.75,3873.5 3951.75,3873.5 ; 3950.25,3718.5 3954.75,3718.5 ; 3950.25,3719 3954.25,3719 ; 3950.25,3735 3978.25,3735 ; 3950.25,3860.5 3956.75,3860.5 ; 3950.75,3717.5 3955.25,3717.5 ; 3950.75,3718 3954.75,3718 ; 3950.75,3720 3953.25,3720 ; 3950.75,3735.5 3977.25,3735.5 ; 3950.75,3784 3981.25,3784 ; 3950.75,3860 3957.25,3860 ; 3950.75,3878.5 3954.25,3878.5 ; 3950.75,3879 3953.75,3879 ; 3950.75,3879.5 3953.75,3879.5 ; 3950.75,3880 3953.25,3880 ; 3951.25,3716.5 3955.25,3716.5 ; 3951.25,3717 3955.25,3717 ; 3951.25,3800.5 3982.25,3800.5 ; 3951.25,3812 3981.25,3812 ; 3951.25,3878 3958.75,3878 ; 3951.75,3715 3954.75,3715 ; 3951.75,3715.5 3955.25,3715.5 ; 3951.75,3716 3955.25,3716 ; 3951.75,3736 3976.75,3736 ; 3951.75,3784.5 3981.25,3784.5 ; 3951.75,3800 3982.25,3800 ; 3951.75,3802.5 3982.25,3802.5 ; 3951.75,3803 3982.25,3803 ; 3951.75,3859.5 3957.25,3859.5 ; 3952.25,3714.5 3954.25,3714.5 ; 3952.25,3736.5 3976.25,3736.5 ; 3952.25,3803.5 3982.25,3803.5 ; 3952.25,3859 3957.75,3859 ; 3952.25,3866.5 3962.25,3866.5 ; 3952.25,3872 3958.25,3872 ; 3952.25,3877.5 3958.75,3877.5 ; 3952.75,3712 3965.75,3712 ; 3952.75,3714 3953.25,3714 ; 3952.75,3785 3981.25,3785 ; 3952.75,3799.5 3982.25,3799.5 ; 3952.75,3804 3982.25,3804 ; 3952.75,3811.5 3981.25,3811.5 ; 3952.75,3877 3958.75,3877 ; 3952.75,3881.5 3968.75,3881.5 ; 3953.25,3712.5 3966.75,3712.5 ; 3953.25,3722 3957.25,3722 ; 3953.25,3737 3975.25,3737 ; 3953.25,3785.5 3981.25,3785.5 ; 3953.25,3804.5 3982.25,3804.5 ; 3953.25,3858.5 3957.75,3858.5 ; 3953.25,3866 3962.25,3866 ; 3953.25,3872.5 3958.25,3872.5 ; 3953.25,3876.5 3958.75,3876.5 ; 3953.75,3737.5 3975.25,3737.5 ; 3953.75,3786 3981.25,3786 ; 3953.75,3799 3982.25,3799 ; 3953.75,3805 3982.25,3805 ; 3953.75,3811 3981.25,3811 ; 3953.75,3858 3958.25,3858 ; 3953.75,3873 3958.25,3873 ; 3953.75,3873.5 3958.25,3873.5 ; 3953.75,3874 3958.25,3874 ; 3953.75,3875 3958.75,3875 ; 3953.75,3875.5 3958.75,3875.5 ; 3953.75,3876 3958.75,3876 ; 3953.75,3881 3969.75,3881 ; 3954.25,3721.5 3957.75,3721.5 ; 3954.25,3786.5 3981.75,3786.5 ; 3954.25,3798.5 3982.25,3798.5 ; 3954.25,3805.5 3982.25,3805.5 ; 3954.25,3874.5 3958.25,3874.5 ; 3954.75,3713 3967.25,3713 ; 3954.75,3738 3974.25,3738 ; 3954.75,3787 3981.75,3787 ; 3954.75,3787.5 3981.75,3787.5 ; 3954.75,3798 3982.25,3798 ; 3954.75,3806 3982.25,3806 ; 3954.75,3810.5 3981.25,3810.5 ; 3954.75,3857.5 3958.25,3857.5 ; 3954.75,3865.5 3962.25,3865.5 ; 3954.75,3880 3971.25,3880 ; 3954.75,3880.5 3970.25,3880.5 ; 3955.25,3713.5 3968.25,3713.5 ; 3955.25,3721 3957.75,3721 ; 3955.25,3738.5 3973.75,3738.5 ; 3955.25,3788 3981.75,3788 ; 3955.25,3797 3982.25,3797 ; 3955.25,3797.5 3982.25,3797.5 ; 3955.25,3806.5 3982.25,3806.5 ; 3955.25,3810 3981.25,3810 ; 3955.25,3857 3958.25,3857 ; 3955.25,3865 3962.75,3865 ; 3955.25,3879.5 3971.75,3879.5 ; 3955.75,3714 3968.75,3714 ; 3955.75,3720 3958.25,3720 ; 3955.75,3720.5 3958.25,3720.5 ; 3955.75,3739 3973.25,3739 ; 3955.75,3788.5 3981.75,3788.5 ; 3955.75,3789 3981.75,3789 ; 3955.75,3789.5 3982.25,3789.5 ; 3955.75,3796 3982.25,3796 ; 3955.75,3796.5 3982.25,3796.5 ; 3955.75,3807 3981.75,3807 ; 3955.75,3856.5 3958.25,3856.5 ; 3955.75,3864.5 3962.75,3864.5 ; 3955.75,3878.5 3972.75,3878.5 ; 3955.75,3879 3972.25,3879 ; 3956.25,3714.5 3969.25,3714.5 ; 3956.25,3719.5 3958.75,3719.5 ; 3956.25,3739.5 3973.75,3739.5 ; 3956.25,3790 3982.25,3790 ; 3956.25,3790.5 3982.25,3790.5 ; 3956.25,3791 3982.25,3791 ; 3956.25,3794.5 3982.25,3794.5 ; 3956.25,3795 3982.25,3795 ; 3956.25,3795.5 3982.25,3795.5 ; 3956.25,3807.5 3981.75,3807.5 ; 3956.25,3809.5 3981.25,3809.5 ; 3956.75,3715 3970.25,3715 ; 3956.75,3715.5 3971.25,3715.5 ; 3956.75,3716 3971.25,3716 ; 3956.75,3716.5 3972.25,3716.5 ; 3956.75,3717 3972.75,3717 ; 3956.75,3717.5 3973.25,3717.5 ; 3956.75,3718 3960.75,3718 ; 3956.75,3718.5 3960.25,3718.5 ; 3956.75,3719 3959.25,3719 ; 3956.75,3791.5 3982.25,3791.5 ; 3956.75,3792 3982.25,3792 ; 3956.75,3792.5 3982.25,3792.5 ; 3956.75,3793 3982.25,3793 ; 3956.75,3793.5 3982.25,3793.5 ; 3956.75,3794 3982.25,3794 ; 3956.75,3808 3981.75,3808 ; 3956.75,3809 3981.75,3809 ; 3956.75,3856 3958.75,3856 ; 3956.75,3864 3963.25,3864 ; 3957.25,3740 3974.25,3740 ; 3957.25,3808.5 3981.75,3808.5 ; 3957.25,3855.5 3958.75,3855.5 ; 3957.25,3863.5 3963.75,3863.5 ; 3957.75,3740.5 3974.25,3740.5 ; 3957.75,3855 3958.75,3855 ; 3957.75,3862.5 3973.75,3862.5 ; 3957.75,3863 3965.25,3863 ; 3958.25,3741 3974.75,3741 ; 3958.25,3854.5 3958.75,3854.5 ; 3958.25,3862 3973.25,3862 ; 3958.25,3868.5 3965.25,3868.5 ; 3958.75,3723 3964.25,3723 ; 3958.75,3723.5 3963.75,3723.5 ; 3958.75,3724 3963.25,3724 ; 3958.75,3741.5 3975.25,3741.5 ; 3958.75,3861 3972.25,3861 ; 3958.75,3861.5 3972.75,3861.5 ; 3958.75,3869 3965.25,3869 ; 3958.75,3869.5 3965.25,3869.5 ; 3959.25,3722 3964.25,3722 ; 3959.25,3722.5 3964.25,3722.5 ; 3959.25,3724.5 3963.25,3724.5 ; 3959.25,3860.5 3971.75,3860.5 ; 3959.25,3870 3965.25,3870 ; 3959.25,3870.5 3965.25,3870.5 ; 3959.25,3878 3973.25,3878 ; 3959.75,3721 3964.25,3721 ; 3959.75,3721.5 3964.25,3721.5 ; 3959.75,3725 3962.75,3725 ; 3959.75,3725.5 3962.25,3725.5 ; 3959.75,3742 3975.75,3742 ; 3959.75,3742.5 3976.75,3742.5 ; 3959.75,3859 3970.25,3859 ; 3959.75,3859.5 3970.75,3859.5 ; 3959.75,3860 3971.25,3860 ; 3959.75,3871 3965.25,3871 ; 3960.25,3720.5 3964.25,3720.5 ; 3960.25,3858 3970.75,3858 ; 3960.25,3858.5 3970.25,3858.5 ; 3960.25,3871.5 3965.75,3871.5 ; 3960.25,3874 3961.25,3874 ; 3960.25,3874.5 3961.75,3874.5 ; 3960.25,3875 3962.75,3875 ; 3960.25,3875.5 3963.25,3875.5 ; 3960.25,3876 3976.25,3876 ; 3960.25,3876.5 3975.25,3876.5 ; 3960.25,3877 3974.75,3877 ; 3960.25,3877.5 3974.25,3877.5 ; 3960.75,3720 3963.75,3720 ; 3960.75,3743 3979.75,3743 ; 3960.75,3743.5 3979.25,3743.5 ; 3960.75,3855 3975.75,3855 ; 3960.75,3855.5 3976.25,3855.5 ; 3960.75,3856 3977.25,3856 ; 3960.75,3856.5 3977.25,3856.5 ; 3960.75,3857 3978.25,3857 ; 3960.75,3857.5 3978.75,3857.5 ; 3960.75,3872 3966.25,3872 ; 3961.25,3852 3976.25,3852 ; 3961.25,3852.5 3975.75,3852.5 ; 3961.25,3853 3975.25,3853 ; 3961.25,3853.5 3974.75,3853.5 ; 3961.25,3854 3974.25,3854 ; 3961.25,3854.5 3975.25,3854.5 ; 3961.75,3719.5 3963.25,3719.5 ; 3961.75,3744 3979.25,3744 ; 3961.75,3851.5 3976.75,3851.5 ; 3961.75,3872.5 3979.75,3872.5 ; 3962.25,3744.5 3979.25,3744.5 ; 3962.25,3851 3977.25,3851 ; 3962.25,3873 3979.25,3873 ; 3962.75,3727 3983.75,3727 ; 3962.75,3745 3978.75,3745 ; 3962.75,3850.5 3977.25,3850.5 ; 3963.25,3745.5 3978.75,3745.5 ; 3963.25,3850 3977.75,3850 ; 3963.25,3873.5 3978.75,3873.5 ; 3963.75,3718 3974.25,3718 ; 3963.75,3726.5 3983.75,3726.5 ; 3963.75,3746 3978.75,3746 ; 3963.75,3849.5 3978.25,3849.5 ; 3963.75,3866 3967.25,3866 ; 3963.75,3866.5 3966.75,3866.5 ; 3963.75,3867 3966.25,3867 ; 3963.75,3874 3978.25,3874 ; 3963.75,3875.5 3976.25,3875.5 ; 3964.25,3718.5 3974.75,3718.5 ; 3964.25,3726 3982.75,3726 ; 3964.25,3746.5 3979.25,3746.5 ; 3964.25,3849 3982.25,3849 ; 3964.25,3865 3967.25,3865 ; 3964.25,3865.5 3967.25,3865.5 ; 3964.25,3875 3977.25,3875 ; 3964.75,3725 3981.75,3725 ; 3964.75,3725.5 3982.25,3725.5 ; 3964.75,3747 3979.25,3747 ; 3964.75,3747.5 3979.25,3747.5 ; 3964.75,3848 3980.75,3848 ; 3964.75,3848.5 3981.75,3848.5 ; 3964.75,3864.5 3966.75,3864.5 ; 3964.75,3874.5 3977.75,3874.5 ; 3965.25,3719 3975.25,3719 ; 3965.25,3724.5 3981.25,3724.5 ; 3965.75,3719.5 3976.25,3719.5 ; 3965.75,3720 3976.25,3720 ; 3965.75,3720.5 3977.25,3720.5 ; 3965.75,3723.5 3980.25,3723.5 ; 3965.75,3724 3980.75,3724 ; 3965.75,3748 3979.75,3748 ; 3965.75,3748.5 3980.25,3748.5 ; 3965.75,3847.5 3979.75,3847.5 ; 3966.25,3721 3977.75,3721 ; 3966.25,3721.5 3978.25,3721.5 ; 3966.25,3722 3978.75,3722 ; 3966.25,3722.5 3979.25,3722.5 ; 3966.25,3723 3979.75,3723 ; 3966.25,3847 3980.25,3847 ; 3966.75,3749 3980.75,3749 ; 3966.75,3749.5 3981.75,3749.5 ; 3966.75,3846 3984.25,3846 ; 3966.75,3846.5 3980.25,3846.5 ; 3966.75,3869 3969.75,3869 ; 3966.75,3869.5 3969.75,3869.5 ; 3966.75,3870 3969.25,3870 ; 3966.75,3870.5 3969.25,3870.5 ; 3967.25,3750 3986.25,3750 ; 3967.25,3845.5 3983.75,3845.5 ; 3967.25,3863 3974.25,3863 ; 3967.25,3868.5 3969.75,3868.5 ; 3967.75,3750.5 3985.75,3750.5 ; 3967.75,3845 3983.25,3845 ; 3967.75,3868 3984.75,3868 ; 3968.25,3751 3984.75,3751 ; 3968.25,3844.5 3982.75,3844.5 ; 3968.25,3863.5 3974.75,3863.5 ; 3968.25,3867.5 3985.25,3867.5 ; 3968.75,3751.5 3983.75,3751.5 ; 3968.75,3752 3982.75,3752 ; 3968.75,3844 3982.25,3844 ; 3968.75,3864 3975.25,3864 ; 3968.75,3864.5 3975.25,3864.5 ; 3968.75,3865 3975.25,3865 ; 3968.75,3866 3974.25,3866 ; 3968.75,3866.5 3973.75,3866.5 ; 3968.75,3867 3974.25,3867 ; 3968.75,3872 3980.25,3872 ; 3969.25,3752.5 3982.75,3752.5 ; 3969.25,3843 3987.75,3843 ; 3969.25,3843.5 3982.25,3843.5 ; 3969.25,3865.5 3974.25,3865.5 ; 3969.75,3753 3983.25,3753 ; 3969.75,3842.5 3986.75,3842.5 ; 3969.75,3871.5 3980.75,3871.5 ; 3970.25,3753.5 3991.25,3753.5 ; 3970.25,3842 3986.25,3842 ; 3970.25,3871 3981.25,3871 ; 3970.75,3754 3990.75,3754 ; 3970.75,3754.5 3989.75,3754.5 ; 3970.75,3841 3984.25,3841 ; 3970.75,3841.5 3985.25,3841.5 ; 3970.75,3870 3982.75,3870 ; 3970.75,3870.5 3981.75,3870.5 ; 3971.25,3755 3988.75,3755 ; 3971.25,3840.5 3984.25,3840.5 ; 3971.25,3868.5 3984.25,3868.5 ; 3971.25,3869 3983.75,3869 ; 3971.25,3869.5 3983.25,3869.5 ; 3971.75,3728 3984.75,3728 ; 3971.75,3755.5 3987.75,3755.5 ; 3971.75,3756 3986.75,3756 ; 3971.75,3839.5 3984.75,3839.5 ; 3971.75,3840 3984.75,3840 ; 3971.75,3858 3979.25,3858 ; 3972.25,3756.5 3986.25,3756.5 ; 3972.25,3839 3991.25,3839 ; 3972.25,3858.5 3979.75,3858.5 ; 3972.75,3728.5 3985.75,3728.5 ; 3972.75,3757 3985.75,3757 ; 3972.75,3757.5 3985.75,3757.5 ; 3972.75,3838 3987.25,3838 ; 3972.75,3838.5 3990.75,3838.5 ; 3972.75,3859 3980.75,3859 ; 3973.25,3729 3985.75,3729 ; 3973.25,3730 3986.75,3730 ; 3973.25,3758 3986.25,3758 ; 3973.25,3758.5 3989.25,3758.5 ; 3973.25,3837.5 3987.25,3837.5 ; 3973.25,3859.5 3981.25,3859.5 ; 3973.75,3729.5 3986.25,3729.5 ; 3973.75,3759 3988.25,3759 ; 3973.75,3836.5 3986.75,3836.5 ; 3973.75,3837 3986.75,3837 ; 3973.75,3860 3991.75,3860 ; 3974.25,3759.5 3987.25,3759.5 ; 3974.25,3760 3986.75,3760 ; 3974.25,3836 3986.75,3836 ; 3974.25,3860.5 3990.75,3860.5 ; 3974.75,3760.5 3987.25,3760.5 ; 3974.75,3761 4005.75,3761 ; 3974.75,3835 3986.75,3835 ; 3974.75,3835.5 3986.75,3835.5 ; 3974.75,3861 3990.75,3861 ; 3974.75,3867 3985.75,3867 ; 3975.25,3739.5 3978.25,3739.5 ; 3975.25,3740 3978.25,3740 ; 3975.25,3761.5 3995.75,3761.5 ; 3975.25,3834 3987.25,3834 ; 3975.25,3834.5 3987.25,3834.5 ; 3975.25,3861.5 3978.25,3861.5 ; 3975.75,3739 3977.75,3739 ; 3975.75,3740.5 3977.75,3740.5 ; 3975.75,3762 3994.25,3762 ; 3975.75,3762.5 3993.25,3762.5 ; 3975.75,3833 3987.75,3833 ; 3975.75,3833.5 3987.75,3833.5 ; 3975.75,3862 3978.25,3862 ; 3975.75,3866 3986.75,3866 ; 3975.75,3866.5 3985.75,3866.5 ; 3976.25,3738.5 3977.25,3738.5 ; 3976.25,3763 3991.75,3763 ; 3976.25,3763.5 3990.75,3763.5 ; 3976.25,3832 3989.75,3832 ; 3976.25,3832.5 3988.25,3832.5 ; 3976.25,3862.5 3977.25,3862.5 ; 3976.75,3764 3989.25,3764 ; 3976.75,3764.5 3988.75,3764.5 ; 3976.75,3831 4007.25,3831 ; 3976.75,3831.5 4006.75,3831.5 ; 3976.75,3853.5 3980.75,3853.5 ; 3976.75,3863 3977.25,3863 ; 3976.75,3865 3987.25,3865 ; 3976.75,3865.5 3986.75,3865.5 ; 3977.25,3742.5 3980.25,3742.5 ; 3977.25,3765 3989.25,3765 ; 3977.25,3765.5 3989.25,3765.5 ; 3977.25,3830 4007.75,3830 ; 3977.25,3830.5 4007.25,3830.5 ; 3977.25,3853 3996.75,3853 ; 3977.25,3854 3980.25,3854 ; 3977.75,3737.5 3981.25,3737.5 ; 3977.75,3766 3989.75,3766 ; 3977.75,3766.5 3989.75,3766.5 ; 3977.75,3829 4007.75,3829 ; 3977.75,3829.5 4007.75,3829.5 ; 3977.75,3852 3987.75,3852 ; 3977.75,3852.5 3996.75,3852.5 ; 3977.75,3854.5 3979.75,3854.5 ; 3977.75,3864 3988.25,3864 ; 3977.75,3864.5 3987.75,3864.5 ; 3978.25,3737 3981.25,3737 ; 3978.25,3767 3989.75,3767 ; 3978.25,3767.5 3990.25,3767.5 ; 3978.25,3828 4008.25,3828 ; 3978.25,3828.5 4007.75,3828.5 ; 3978.25,3855 3979.25,3855 ; 3978.75,3736.5 3980.75,3736.5 ; 3978.75,3738 3981.25,3738 ; 3978.75,3738.5 3981.25,3738.5 ; 3978.75,3741.5 3981.75,3741.5 ; 3978.75,3742 3980.75,3742 ; 3978.75,3768 3990.75,3768 ; 3978.75,3768.5 3990.75,3768.5 ; 3978.75,3769 3991.25,3769 ; 3978.75,3826.5 3995.75,3826.5 ; 3978.75,3827 3997.75,3827 ; 3978.75,3827.5 3999.25,3827.5 ; 3978.75,3851 3985.75,3851 ; 3978.75,3851.5 3986.75,3851.5 ; 3978.75,3863.5 3988.75,3863.5 ; 3979.25,3736 3980.25,3736 ; 3979.25,3740.5 3995.25,3740.5 ; 3979.25,3741 3982.25,3741 ; 3979.25,3769.5 3992.25,3769.5 ; 3979.25,3770 3997.25,3770 ; 3979.25,3825.5 3992.75,3825.5 ; 3979.25,3826 3994.75,3826 ; 3979.25,3849.5 3983.25,3849.5 ; 3979.25,3850.5 3984.75,3850.5 ; 3979.25,3861.5 3990.25,3861.5 ; 3979.25,3863 3989.25,3863 ; 3979.75,3770.5 3996.25,3770.5 ; 3979.75,3771 3994.75,3771 ; 3979.75,3771.5 3993.75,3771.5 ; 3979.75,3824 3991.25,3824 ; 3979.75,3824.5 3991.25,3824.5 ; 3979.75,3825 3991.25,3825 ; 3979.75,3850 3984.25,3850 ; 3979.75,3862 3989.75,3862 ; 3979.75,3862.5 3989.75,3862.5 ; 3980.25,3734 3990.25,3734 ; 3980.25,3745 3986.75,3745 ; 3980.25,3745.5 3986.75,3745.5 ; 3980.25,3746 3986.25,3746 ; 3980.25,3746.5 3985.75,3746.5 ; 3980.25,3772 3991.75,3772 ; 3980.25,3772.5 3991.75,3772.5 ; 3980.25,3823 3991.75,3823 ; 3980.25,3823.5 3991.25,3823.5 ; 3980.25,3856 3983.25,3856 ; 3980.25,3856.5 3982.75,3856.5 ; 3980.75,3734.5 3990.75,3734.5 ; 3980.75,3744 3986.75,3744 ; 3980.75,3744.5 3986.75,3744.5 ; 3980.75,3747 3985.25,3747 ; 3980.75,3747.5 3984.75,3747.5 ; 3980.75,3773 3991.75,3773 ; 3980.75,3773.5 3992.25,3773.5 ; 3980.75,3774 3992.25,3774 ; 3980.75,3774.5 3992.75,3774.5 ; 3980.75,3821.5 3991.75,3821.5 ; 3980.75,3822 3991.75,3822 ; 3980.75,3822.5 3991.75,3822.5 ; 3980.75,3855 3984.25,3855 ; 3980.75,3855.5 3983.75,3855.5 ; 3980.75,3857 3982.25,3857 ; 3981.25,3735 3990.75,3735 ; 3981.25,3775 3992.75,3775 ; 3981.25,3775.5 3992.75,3775.5 ; 3981.25,3820 3992.75,3820 ; 3981.25,3820.5 3992.25,3820.5 ; 3981.25,3821 3992.25,3821 ; 3981.25,3853.5 3995.75,3853.5 ; 3981.25,3854.5 3984.75,3854.5 ; 3981.75,3735.5 3991.75,3735.5 ; 3981.75,3736 3991.75,3736 ; 3981.75,3740 3994.75,3740 ; 3981.75,3743.5 3986.25,3743.5 ; 3981.75,3748 3983.25,3748 ; 3981.75,3776 3993.25,3776 ; 3981.75,3776.5 3993.25,3776.5 ; 3981.75,3777 3999.25,3777 ; 3981.75,3777.5 3997.75,3777.5 ; 3981.75,3818 3993.25,3818 ; 3981.75,3818.5 4010.75,3818.5 ; 3981.75,3819 4010.25,3819 ; 3981.75,3819.5 3992.75,3819.5 ; 3981.75,3846.5 3984.75,3846.5 ; 3981.75,3854 3995.75,3854 ; 3982.25,3736.5 3992.25,3736.5 ; 3982.25,3739.5 3994.25,3739.5 ; 3982.25,3778 3996.25,3778 ; 3982.25,3778.5 3994.75,3778.5 ; 3982.25,3779 3993.75,3779 ; 3982.25,3816.5 3994.75,3816.5 ; 3982.25,3817 3993.25,3817 ; 3982.25,3817.5 3993.25,3817.5 ; 3982.25,3847 3985.25,3847 ; 3982.25,3859.5 3991.75,3859.5 ; 3982.75,3737 3992.75,3737 ; 3982.75,3737.5 3992.75,3737.5 ; 3982.75,3738 3993.25,3738 ; 3982.75,3738.5 3993.75,3738.5 ; 3982.75,3739 3993.75,3739 ; 3982.75,3743 3985.75,3743 ; 3982.75,3779.5 3993.75,3779.5 ; 3982.75,3780 3994.25,3780 ; 3982.75,3780.5 3994.25,3780.5 ; 3982.75,3815 3995.75,3815 ; 3982.75,3815.5 3995.75,3815.5 ; 3982.75,3816 3995.75,3816 ; 3982.75,3859 3992.25,3859 ; 3983.25,3742.5 3985.25,3742.5 ; 3983.25,3781 3994.25,3781 ; 3983.25,3781.5 3994.75,3781.5 ; 3983.25,3782 3994.75,3782 ; 3983.25,3782.5 3994.75,3782.5 ; 3983.25,3783 3995.25,3783 ; 3983.25,3783.5 3995.75,3783.5 ; 3983.25,3812 3994.75,3812 ; 3983.25,3812.5 3995.25,3812.5 ; 3983.25,3813 3996.25,3813 ; 3983.25,3813.5 3996.25,3813.5 ; 3983.25,3814 3996.25,3814 ; 3983.25,3814.5 3996.25,3814.5 ; 3983.25,3847.5 3985.75,3847.5 ; 3983.25,3858 3992.75,3858 ; 3983.25,3858.5 3992.75,3858.5 ; 3983.75,3784 4011.75,3784 ; 3983.75,3784.5 4011.75,3784.5 ; 3983.75,3785 4011.75,3785 ; 3983.75,3785.5 4011.75,3785.5 ; 3983.75,3810 4011.75,3810 ; 3983.75,3810.5 3994.75,3810.5 ; 3983.75,3811 3994.75,3811 ; 3983.75,3811.5 3994.25,3811.5 ; 3984.25,3749.5 3987.25,3749.5 ; 3984.25,3753 3991.25,3753 ; 3984.25,3786 4011.75,3786 ; 3984.25,3786.5 4011.75,3786.5 ; 3984.25,3787 4011.75,3787 ; 3984.25,3787.5 4011.75,3787.5 ; 3984.25,3788 4012.25,3788 ; 3984.25,3788.5 4012.25,3788.5 ; 3984.25,3789 4012.25,3789 ; 3984.25,3789.5 3997.75,3789.5 ; 3984.25,3790 3998.25,3790 ; 3984.25,3790.5 3998.25,3790.5 ; 3984.25,3791 3998.75,3791 ; 3984.25,3805 3995.25,3805 ; 3984.25,3805.5 3995.25,3805.5 ; 3984.25,3806 3995.25,3806 ; 3984.25,3806.5 3995.25,3806.5 ; 3984.25,3807 3995.25,3807 ; 3984.25,3807.5 3995.25,3807.5 ; 3984.25,3808 3994.75,3808 ; 3984.25,3808.5 3994.75,3808.5 ; 3984.25,3809 3998.75,3809 ; 3984.25,3809.5 4001.75,3809.5 ; 3984.25,3848 3986.25,3848 ; 3984.25,3857 3993.75,3857 ; 3984.25,3857.5 3993.25,3857.5 ; 3984.75,3791.5 3998.75,3791.5 ; 3984.75,3792 3998.75,3792 ; 3984.75,3792.5 3998.75,3792.5 ; 3984.75,3793 3997.75,3793 ; 3984.75,3793.5 3997.25,3793.5 ; 3984.75,3794 3996.75,3794 ; 3984.75,3794.5 3999.75,3794.5 ; 3984.75,3795 3999.75,3795 ; 3984.75,3795.5 3999.75,3795.5 ; 3984.75,3796 3999.75,3796 ; 3984.75,3796.5 4000.25,3796.5 ; 3984.75,3797 4000.25,3797 ; 3984.75,3797.5 4012.75,3797.5 ; 3984.75,3798 4012.75,3798 ; 3984.75,3798.5 4012.75,3798.5 ; 3984.75,3799 4012.75,3799 ; 3984.75,3799.5 4012.75,3799.5 ; 3984.75,3800 4012.75,3800 ; 3984.75,3800.5 4012.25,3800.5 ; 3984.75,3801 4012.25,3801 ; 3984.75,3801.5 3996.75,3801.5 ; 3984.75,3802 3996.75,3802 ; 3984.75,3802.5 3995.75,3802.5 ; 3984.75,3803 3995.75,3803 ; 3984.75,3803.5 3995.75,3803.5 ; 3984.75,3804 3995.75,3804 ; 3984.75,3804.5 3995.25,3804.5 ; 3984.75,3843.5 3988.25,3843.5 ; 3984.75,3856.5 3993.75,3856.5 ; 3985.25,3749 3988.25,3749 ; 3985.25,3752.5 3991.25,3752.5 ; 3985.25,3839.5 3991.25,3839.5 ; 3985.25,3848.5 3986.75,3848.5 ; 3985.25,3854.5 3995.25,3854.5 ; 3985.25,3856 3994.25,3856 ; 3985.75,3741 3995.25,3741 ; 3985.75,3748.5 3999.75,3748.5 ; 3985.75,3840 3992.25,3840 ; 3985.75,3844 3989.25,3844 ; 3985.75,3845.5 3986.25,3845.5 ; 3985.75,3846 3988.75,3846 ; 3985.75,3849 3987.25,3849 ; 3985.75,3855.5 3994.75,3855.5 ; 3986.25,3741.5 3995.75,3741.5 ; 3986.25,3752 3991.25,3752 ; 3986.25,3846.5 3989.75,3846.5 ; 3986.25,3855 3994.75,3855 ; 3986.75,3742 3995.75,3742 ; 3986.75,3748 3999.75,3748 ; 3986.75,3751.5 3991.25,3751.5 ; 3986.75,3758 3989.75,3758 ; 3986.75,3840.5 4003.25,3840.5 ; 3986.75,3847 3999.75,3847 ; 3986.75,3849.5 3987.75,3849.5 ; 3987.25,3742.5 3996.25,3742.5 ; 3987.25,3743 3996.75,3743 ; 3987.25,3747 3999.25,3747 ; 3987.25,3747.5 3999.25,3747.5 ; 3987.25,3757.5 3991.25,3757.5 ; 3987.25,3841 4003.25,3841 ; 3987.25,3847.5 3999.75,3847.5 ; 3987.25,3850 3987.75,3850 ; 3987.75,3743.5 3996.75,3743.5 ; 3987.75,3744 3997.25,3744 ; 3987.75,3746 3998.75,3746 ; 3987.75,3746.5 3998.75,3746.5 ; 3987.75,3751 3990.75,3751 ; 3987.75,3838 3990.75,3838 ; 3987.75,3848 3999.75,3848 ; 3988.25,3744.5 3997.75,3744.5 ; 3988.25,3745 3997.75,3745 ; 3988.25,3745.5 3998.25,3745.5 ; 3988.25,3757 3991.75,3757 ; 3988.25,3835 3991.25,3835 ; 3988.25,3835.5 3991.25,3835.5 ; 3988.25,3836 3991.25,3836 ; 3988.25,3836.5 3990.75,3836.5 ; 3988.25,3837.5 3990.75,3837.5 ; 3988.25,3841.5 4002.75,3841.5 ; 3988.25,3844.5 3989.75,3844.5 ; 3988.25,3848.5 3999.25,3848.5 ; 3988.25,3852 3996.75,3852 ; 3988.75,3750.5 3990.25,3750.5 ; 3988.75,3760.5 4005.75,3760.5 ; 3988.75,3834 3990.75,3834 ; 3988.75,3834.5 3991.25,3834.5 ; 3988.75,3837 3990.75,3837 ; 3988.75,3849 3998.75,3849 ; 3988.75,3851 3997.75,3851 ; 3988.75,3851.5 3997.25,3851.5 ; 3989.25,3756.5 3993.25,3756.5 ; 3989.25,3842 4002.75,3842 ; 3989.25,3845 3990.25,3845 ; 3989.25,3849.5 3998.75,3849.5 ; 3989.25,3850 3998.25,3850 ; 3989.25,3850.5 3997.75,3850.5 ; 3989.75,3760 3995.25,3760 ; 3990.25,3756 3993.75,3756 ; 3990.25,3759.5 3995.25,3759.5 ; 3990.25,3842.5 4002.25,3842.5 ; 3990.75,3749 4000.25,3749 ; 3990.75,3765.5 3997.25,3765.5 ; 3990.75,3766 3996.75,3766 ; 3990.75,3832 4006.75,3832 ; 3990.75,3843 4002.25,3843 ; 3991.25,3749.5 4000.75,3749.5 ; 3991.25,3755.5 4003.75,3755.5 ; 3991.25,3765 3997.25,3765 ; 3991.25,3766.5 3996.75,3766.5 ; 3991.25,3767 3996.25,3767 ; 3991.75,3750 4000.75,3750 ; 3991.75,3755 4003.25,3755 ; 3991.75,3759 3994.75,3759 ; 3991.75,3767.5 3995.75,3767.5 ; 3991.75,3843.5 4001.75,3843.5 ; 3991.75,3846 4000.75,3846 ; 3991.75,3846.5 4000.25,3846.5 ; 3992.25,3750.5 4000.75,3750.5 ; 3992.25,3751 4001.25,3751 ; 3992.25,3754.5 4002.75,3754.5 ; 3992.25,3764.5 3996.75,3764.5 ; 3992.25,3832.5 4006.75,3832.5 ; 3992.25,3833 4006.25,3833 ; 3992.25,3844 4001.75,3844 ; 3992.25,3845 4001.25,3845 ; 3992.25,3845.5 4000.75,3845.5 ; 3992.75,3751.5 4001.75,3751.5 ; 3992.75,3752 4001.75,3752 ; 3992.75,3752.5 4002.25,3752.5 ; 3992.75,3753 4002.25,3753 ; 3992.75,3753.5 4002.75,3753.5 ; 3992.75,3754 4002.75,3754 ; 3992.75,3758.5 3994.75,3758.5 ; 3992.75,3833.5 4006.25,3833.5 ; 3992.75,3834 4005.75,3834 ; 3992.75,3835.5 3994.75,3835.5 ; 3992.75,3836 3994.75,3836 ; 3992.75,3836.5 3995.25,3836.5 ; 3992.75,3837 3995.25,3837 ; 3992.75,3837.5 3995.25,3837.5 ; 3992.75,3838 3994.75,3838 ; 3992.75,3838.5 3994.75,3838.5 ; 3992.75,3844.5 4001.25,3844.5 ; 3993.25,3773.5 3996.25,3773.5 ; 3993.25,3819.5 4010.25,3819.5 ; 3993.25,3822 4009.75,3822 ; 3993.25,3822.5 4009.75,3822.5 ; 3993.25,3823 4009.75,3823 ; 3993.25,3823.5 4009.25,3823.5 ; 3993.25,3834.5 4005.75,3834.5 ; 3993.25,3835 3995.75,3835 ; 3993.75,3758 3994.25,3758 ; 3993.75,3764 3996.75,3764 ; 3993.75,3773 3995.75,3773 ; 3993.75,3774 3996.25,3774 ; 3993.75,3774.5 3996.25,3774.5 ; 3993.75,3820.5 4010.25,3820.5 ; 3993.75,3821 4009.75,3821 ; 3993.75,3821.5 4009.75,3821.5 ; 3993.75,3824 4009.25,3824 ; 3994.25,3775 3996.75,3775 ; 3994.25,3775.5 4010.25,3775.5 ; 3994.25,3776 4010.25,3776 ; 3994.25,3776.5 4001.25,3776.5 ; 3994.25,3820 4010.25,3820 ; 3994.75,3756 4003.75,3756 ; 3994.75,3763.5 3996.75,3763.5 ; 3994.75,3769.5 3998.75,3769.5 ; 3994.75,3840 4003.75,3840 ; 3995.25,3756.5 4003.75,3756.5 ; 3995.25,3757 4004.25,3757 ; 3995.25,3757.5 4004.25,3757.5 ; 3995.25,3772.5 3995.75,3772.5 ; 3995.25,3780 3998.25,3780 ; 3995.25,3780.5 3998.25,3780.5 ; 3995.25,3810.5 4011.75,3810.5 ; 3995.25,3839.5 4003.75,3839.5 ; 3995.75,3758 4004.75,3758 ; 3995.75,3781 3998.25,3781 ; 3995.75,3781.5 3998.25,3781.5 ; 3995.75,3811 4011.75,3811 ; 3995.75,3824.5 4009.25,3824.5 ; 3995.75,3839 4003.75,3839 ; 3996.25,3758.5 4004.75,3758.5 ; 3996.25,3759 4004.75,3759 ; 3996.25,3759.5 4005.25,3759.5 ; 3996.25,3760 4005.25,3760 ; 3996.25,3769 4008.75,3769 ; 3996.25,3782 3997.75,3782 ; 3996.25,3806.5 3999.75,3806.5 ; 3996.25,3818 4010.75,3818 ; 3996.25,3835 4005.75,3835 ; 3996.25,3835.5 4005.25,3835.5 ; 3996.25,3836 4005.25,3836 ; 3996.25,3837 4004.75,3837 ; 3996.25,3837.5 4004.75,3837.5 ; 3996.25,3838 4004.25,3838 ; 3996.25,3838.5 4004.25,3838.5 ; 3996.75,3768.5 4008.75,3768.5 ; 3996.75,3772 3999.75,3772 ; 3996.75,3772.5 3999.75,3772.5 ; 3996.75,3779.5 3998.25,3779.5 ; 3996.75,3804.5 3999.75,3804.5 ; 3996.75,3805 3999.75,3805 ; 3996.75,3805.5 3999.75,3805.5 ; 3996.75,3806 3999.75,3806 ; 3996.75,3807 3999.75,3807 ; 3996.75,3811.5 4011.75,3811.5 ; 3996.75,3836.5 4004.75,3836.5 ; 3997.25,3761.5 4005.75,3761.5 ; 3997.25,3762 4006.25,3762 ; 3997.25,3762.5 4006.25,3762.5 ; 3997.25,3768 4008.25,3768 ; 3997.25,3773 3999.75,3773 ; 3997.25,3773.5 4000.25,3773.5 ; 3997.25,3774 4000.25,3774 ; 3997.25,3775 4010.25,3775 ; 3997.25,3803.5 3999.25,3803.5 ; 3997.25,3804 3999.75,3804 ; 3997.25,3814 3997.75,3814 ; 3997.25,3814.5 3998.75,3814.5 ; 3997.25,3815 3999.75,3815 ; 3997.25,3815.5 4000.25,3815.5 ; 3997.25,3816 3999.75,3816 ; 3997.25,3825 4008.75,3825 ; 3997.75,3763 4006.75,3763 ; 3997.75,3763.5 4006.75,3763.5 ; 3997.75,3767.5 4008.25,3767.5 ; 3997.75,3771.5 3999.75,3771.5 ; 3997.75,3774.5 4009.75,3774.5 ; 3997.75,3812 4011.75,3812 ; 3998.25,3764 4006.75,3764 ; 3998.25,3764.5 4007.25,3764.5 ; 3998.25,3765 4007.25,3765 ; 3998.25,3765.5 4007.25,3765.5 ; 3998.25,3766 4007.75,3766 ; 3998.25,3766.5 4007.75,3766.5 ; 3998.25,3767 4007.75,3767 ; 3998.25,3783.5 4011.75,3783.5 ; 3998.25,3789.5 4002.75,3789.5 ; 3998.75,3812.5 4011.75,3812.5 ; 3999.25,3779 4010.75,3779 ; 3999.25,3779.5 4010.75,3779.5 ; 3999.25,3782 4000.25,3782 ; 3999.25,3782.5 4011.75,3782.5 ; 3999.25,3783 4011.75,3783 ; 3999.25,3790 4001.75,3790 ; 3999.25,3801.5 4012.25,3801.5 ; 3999.25,3813 4011.75,3813 ; 3999.25,3825.5 4008.75,3825.5 ; 3999.75,3778.5 4010.75,3778.5 ; 3999.75,3780 4011.25,3780 ; 3999.75,3790.5 4001.75,3790.5 ; 3999.75,3802 4012.25,3802 ; 4000.25,3769.5 4008.75,3769.5 ; 4000.25,3770 4008.75,3770 ; 4000.25,3770.5 4008.75,3770.5 ; 4000.25,3802.5 4001.75,3802.5 ; 4000.25,3803 4001.25,3803 ; 4000.25,3813.5 4011.75,3813.5 ; 4000.25,3826 4008.75,3826 ; 4000.25,3826.5 4008.75,3826.5 ; 4000.25,3827 4008.25,3827 ; 4000.25,3827.5 4008.25,3827.5 ; 4000.75,3771 4009.25,3771 ; 4000.75,3771.5 4009.25,3771.5 ; 4000.75,3780.5 4011.25,3780.5 ; 4000.75,3796.5 4012.75,3796.5 ; 4000.75,3797 4012.75,3797 ; 4000.75,3806.5 4003.75,3806.5 ; 4000.75,3807 4003.25,3807 ; 4000.75,3807.5 4003.25,3807.5 ; 4000.75,3814 4011.25,3814 ; 4001.25,3772 4009.25,3772 ; 4001.25,3772.5 4009.75,3772.5 ; 4001.25,3773 4009.75,3773 ; 4001.25,3773.5 4009.75,3773.5 ; 4001.25,3774 4009.75,3774 ; 4001.25,3794.5 4012.75,3794.5 ; 4001.25,3795 4012.75,3795 ; 4001.25,3795.5 4012.75,3795.5 ; 4001.25,3796 4012.75,3796 ; 4001.25,3804.5 4003.25,3804.5 ; 4001.25,3805 4003.75,3805 ; 4001.25,3805.5 4003.75,3805.5 ; 4001.25,3806 4003.75,3806 ; 4001.25,3817.5 4010.75,3817.5 ; 4001.75,3778 4010.75,3778 ; 4001.75,3804 4002.75,3804 ; 4001.75,3814.5 4011.25,3814.5 ; 4002.25,3776.5 4010.25,3776.5 ; 4002.25,3777 4010.75,3777 ; 4002.25,3777.5 4010.75,3777.5 ; 4002.25,3791.5 4012.25,3791.5 ; 4002.25,3792 4012.25,3792 ; 4002.25,3792.5 4012.25,3792.5 ; 4002.75,3790.5 4012.25,3790.5 ; 4002.75,3791 4012.25,3791 ; 4002.75,3815 4011.25,3815 ; 4003.25,3789.5 4012.25,3789.5 ; 4003.25,3790 4012.25,3790 ; 4003.25,3793 4012.25,3793 ; 4003.25,3815.5 4010.75,3815.5 ; 4003.25,3816 4010.75,3816 ; 4003.25,3816.5 4010.75,3816.5 ; 4003.25,3817 4010.75,3817 ; 4003.75,3781 4011.25,3781 ; 4003.75,3781.5 4011.25,3781.5 ; 4003.75,3793.5 4012.75,3793.5 ; 4004.25,3782 4011.75,3782 ; 4004.25,3802.5 4012.25,3802.5 ; 4004.25,3803 4012.25,3803 ; 4004.25,3808 4011.75,3808 ; 4004.25,3808.5 4011.75,3808.5 ; 4004.25,3809 4011.75,3809 ; 4004.25,3809.5 4011.75,3809.5 ; 4004.75,3794 4012.75,3794 ; 4004.75,3803.5 4012.25,3803.5 ; 4004.75,3804 4012.25,3804 ; 4004.75,3805 4012.25,3805 ; 4004.75,3805.5 4012.25,3805.5 ; 4004.75,3806 4012.25,3806 ; 4004.75,3806.5 4012.25,3806.5 ; 4004.75,3807 4012.25,3807 ; 4004.75,3807.5 4012.25,3807.5 ; 4005.25,3804.5 4012.25,3804.5

## Polygon pours and split planes (outlines as drawn)
GND on Top Layer "Top Layer-No Net" (solid, pour order 0): 2050,3960 3800,3960 3800,3500 3720,3500 3720,3475 3800,3475 3800,3030 2050,3030
GND on Bottom Layer "Top Layer-No Net" (solid, pour order 2): 2055,3950 2060,3955 3800,3955 3800,3500 3720,3500 3720,3475 3800,3475 3800,3040 3795,3035 2055,3035

## Keep-outs
Keep-Out Layer:
  the board outline again, w10

## Silkscreen, mask and mechanical layers (free items; w line width, h text height)
Top Overlay:
  drawing of 3193 lines, arcs and shapes, not listed
  text "Rev.3" at 3819.75,3631.5 h40

## Dimensions
2050,3960 to 2040,3030 on Mechanical 1
2050,3960 to 4040,3960 on Mechanical 1